# Altium PCB RpiAdapterPCB.PcbDoc
Units mm, origin at the board's own origin, x right, y up, seen from the top; angles counter-clockwise.
Board outline 75.5 x 57.27 mm, 2 copper layers (Top Layer, Bottom Layer); 84 components, 60 nets, 309 pads, 52 vias.
Unrouted connection lines stored in the file: 1.
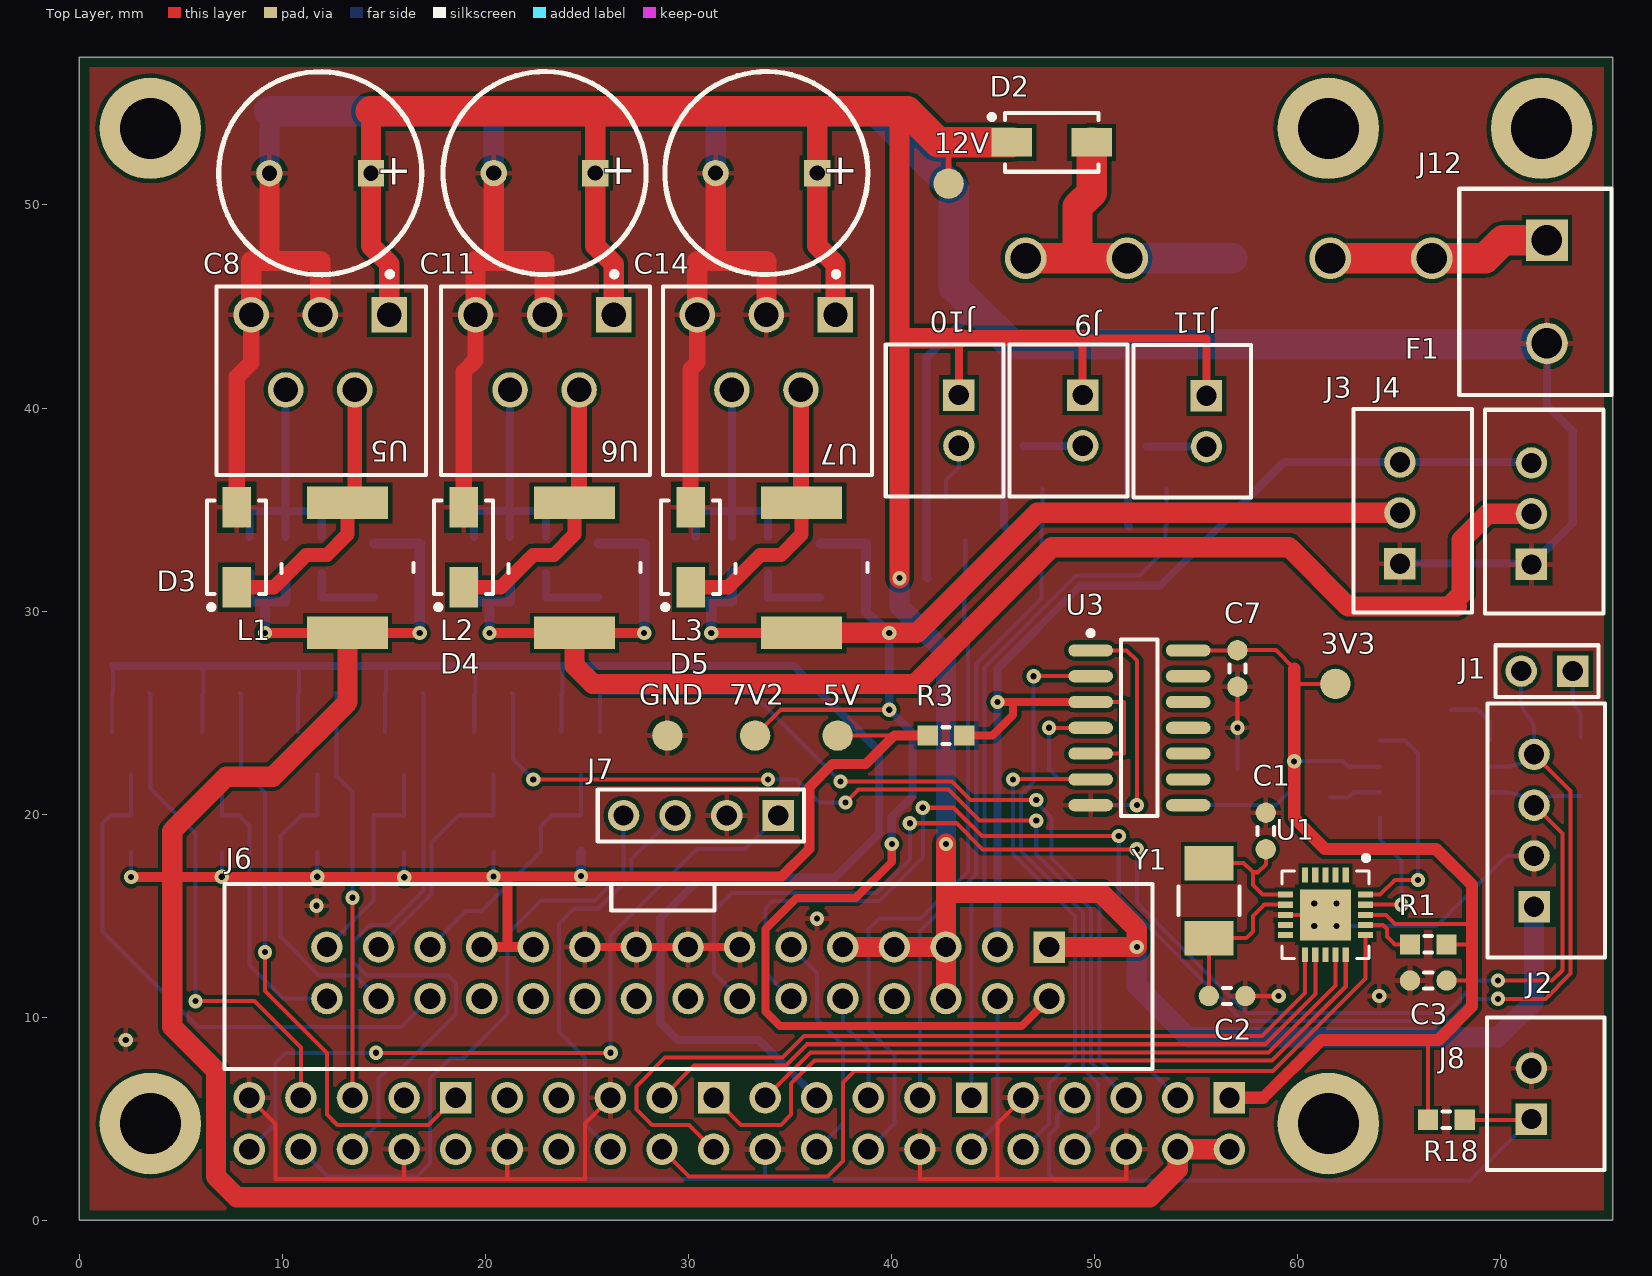
[diagram p0: Top Layer view]
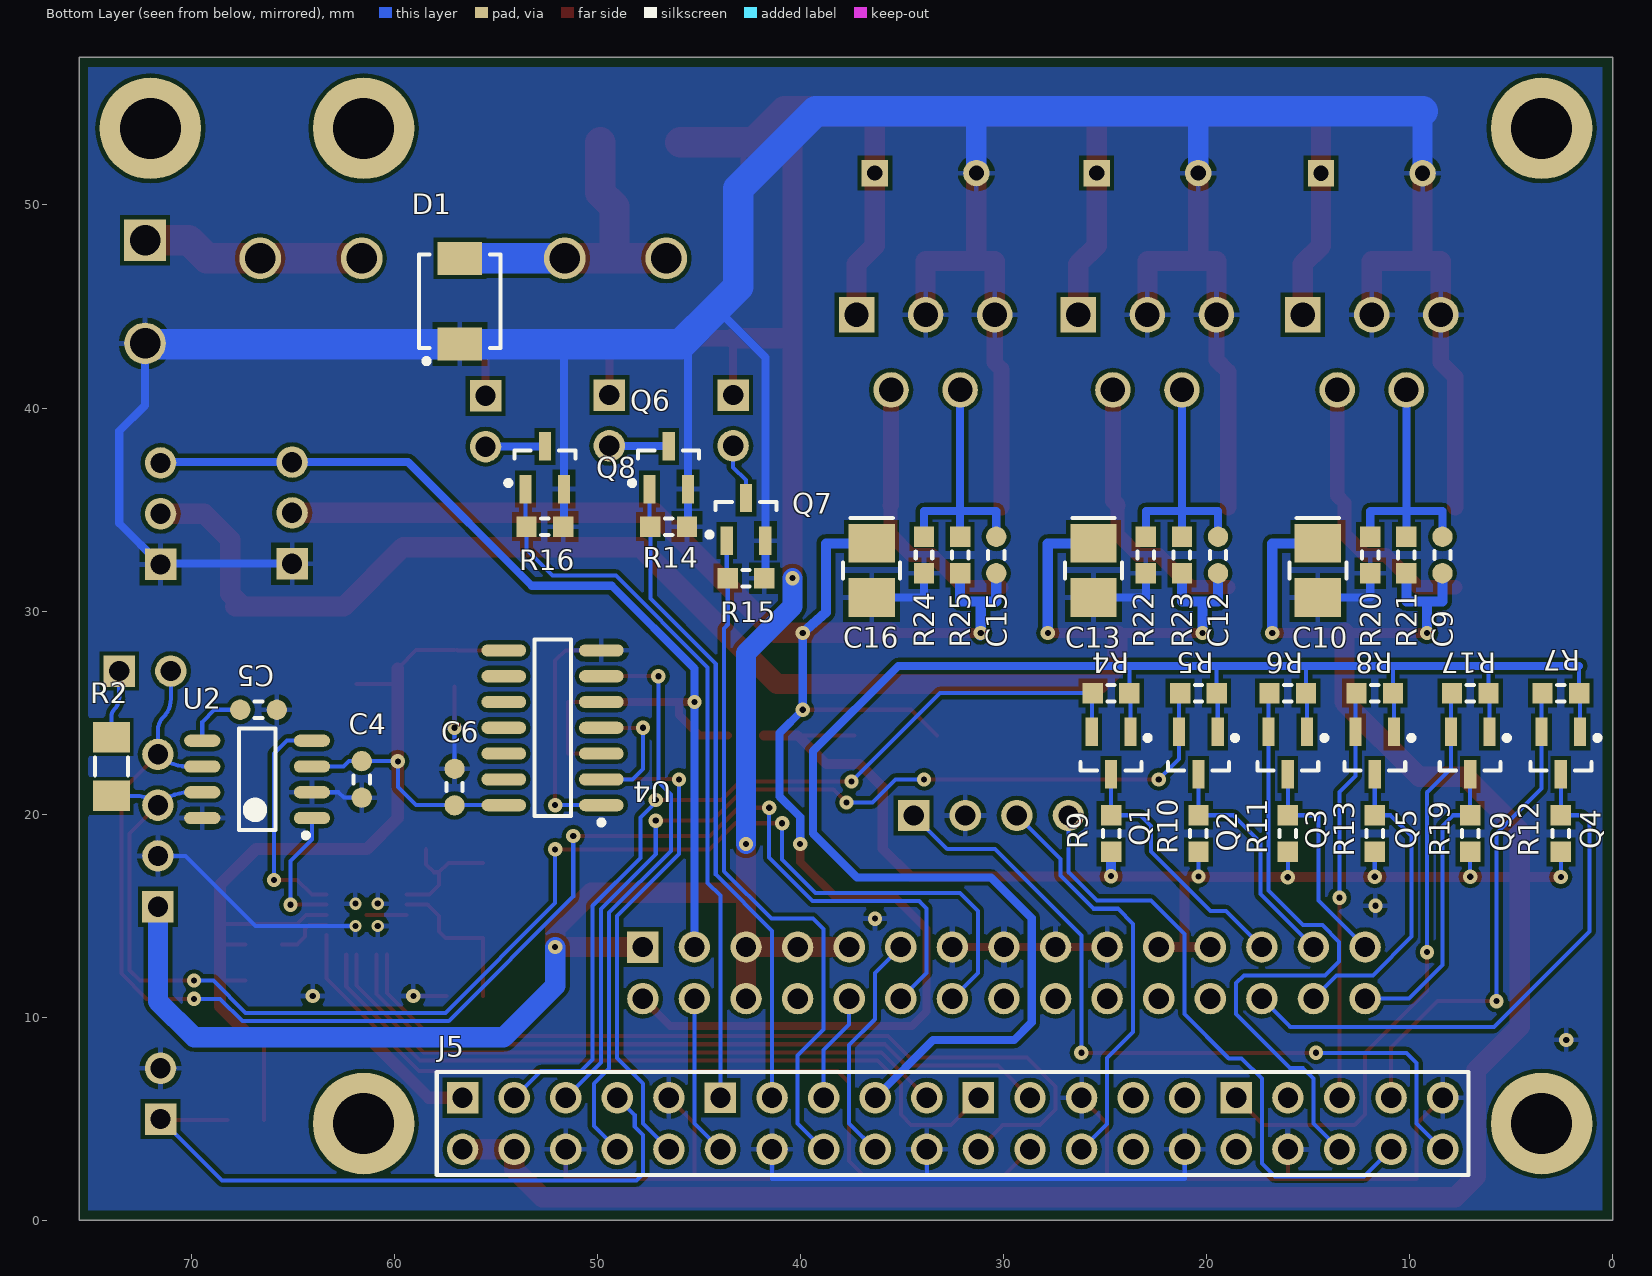
[diagram p1: Bottom Layer view, seen from below]

## Layer stack, top to bottom
Top Solder: solder mask 0.0102, Solder Resist, Dk 3.5
Top Layer: signal copper 0.0356
Dielectric 1: dielectric 0.32, FR-4, Dk 4.8
Bottom Layer: signal copper 0.0356
Bottom Solder: solder mask 0.0102, Solder Resist, Dk 3.5

## Board outline
0,0 0,57.27 75.5,57.27 75.5,0

## Design rules (kind name [scope] priority, off if disabled: settings)
Clearance ViaToViaClearance [IsVia vs IsVia] p1: gap=0.2
Clearance PolyClearance [InPolygon] p2: gap=0.2
Clearance PadToPadClearance [IsPad vs IsPad] p3: gap=0.2
Clearance TrackToAllClearance [IsTrack] p4: gap=0.2
HoleSize [All] p1: absolutevalues=TRUE maxlimit=10 minlimit=0.025 maxpercent=80.000 minpercent=20.000
HoleToHoleClearance [All] p1: gap=0.2 allowstackedmicrovias=TRUE
MinimumSolderMaskSliver [All] p1: minsoldermaskwidth=0.15
PolygonConnect [All] p1: connectstyle=Relief reliefconductorwidth=0.254 reliefentries=4 polygonreliefangle="90 Angle" airgapwidth=0.254
RoutingVias [All] p1: holewidth=0.3 width=0.6 viastyle="Through Hole" minholewidth=0.3 minwidth=0.6 maxholewidth=0.3 maxwidth=0.7
SilkToSilkClearance [All] p1: silktosilkclearance=0.2
SilkToSolderMaskClearance [IsPad] p1: minsilkscreentomaskgap=0.2 clearancetoexposedcopper=TRUE
SolderMaskExpansion [All] p1: expansion=0.1
Width [All] p1: maxlimit=10 minlimit=0.15 preferedwidth=0.5
25 further rules are at their usual default settings.

## Classes and differential pairs
component class Power: 3V3 5V 7V2 12V C8 C9 C10 C11 C12 C13 C14 C15 C16 D1 D2 D3 D4 D5 F1 GND J12 L1 L2 L3 R20 R21 R22 R23 R24 R25 U5 U6 U7
component class Interface: J5 J6 J7 J8 J9 J10 J11 Q1 Q2 Q3 Q4 Q5 Q6 Q7 Q8 Q9 R4 R5 R6 R7 R8 R9 R10 R11 R12 R13 R14 R15 R16 R17 R18 R19
component class Dynamixel: C6 C7 J3 J4 R3 U3 U4
component class CAN: C1 C2 C3 C4 C5 J1 J2 R1 R2 U1 U2 Y1

## Components (designator, comment, footprint, x,y, rotation, side; value= is the part's Value field where it differs from the comment)
3V3 "TestPoint" TestPoint 61.849,26.416 r90 top
5V "TestPoint" TestPoint 37.338,23.876 r0 top
7V2 "TestPoint" TestPoint 33.274,23.876 r90 top
12V "TestPoint" TestPoint 42.799,51.054 r90 top
C1 "22pF" CHIP_C_0603 58.42,19.177 r270 top
C2 "22pF" CHIP_C_0603 56.515,11.049 r180 top
C3 "0.1uF" CHIP_C_0603 66.421,11.811 r0 top
C4 "0.1uF" CHIP_C_0603 61.595,21.717 r90 bottom
C5 "0.1uF" CHIP_C_0603 66.675,25.146 r0 bottom
C6 "0.1uF" CHIP_C_0603 57.023,21.336 r270 bottom
C7 "0.1uF" CHIP_C_0603 57.023,27.178 r90 top
C8 "470uF x 50V" ALCAP_10x20 11.86,51.562 r180 top
C9 "3.3nF" CHIP_C_0603 8.382,32.766 r90 bottom
C10 "220uF x 10V" "Tantal - B" 14.516,32.004 r270 bottom
C11 "470uF x 50V" ALCAP_10x20 22.909,51.57 r180 top
C12 "1nF" CHIP_C_0603 19.431,32.766 r90 bottom
C13 "100uF x 16V" "Tantal - B" 25.565,32.004 r270 bottom
C14 "470uF x 50V" ALCAP_10x20 33.831,51.57 r180 top
C15 "3.3nF" CHIP_C_0603 30.353,32.766 r90 bottom
C16 "220uF x 10V" "Tantal - B" 36.487,32.004 r270 bottom
D1 "SM6T30CA" DO-214AA 56.765,45.261 r90 bottom
D2 "10MQ040" DO214-AC 47.879,53.086 r0 top
D3 "10MQ040(60)" DO214-AC 7.747,33.147 r90 top
D4 "10MQ040(60)" DO214-AC 18.923,33.147 r90 top
D5 "10MQ040(60)" DO214-AC 30.099,33.147 r90 top
F1 "FH-100" FH-100 66.595,47.371 r180 top
GND "TestPoint" TestPoint 28.956,23.876 r90 top
J1 "PLS-2" PLS-2 73.533,27.051 r180 top
J2 "CWF-4" CWF-4 71.628,15.447 r90 top
J3 "CWF-3(R)" CWF-3 65.024,32.338 r90 top
J4 "CWF-3(R)" CWF-3 71.501,32.298 r90 top
J5 "PBD40" PLD40 56.63,6.04 r180 bottom
J6 "BH-30" BH-30 47.752,13.462 r180 top
J7 "PLS-4" PLS-4 34.417,19.939 r180 top
J8 "CWF-2" CWF-2 71.501,4.993 r90 top
J9 "CWF-2" CWF-2 49.403,40.64 r270 top
J10 "CWF-2" CWF-2 43.307,40.64 r270 top
J11 "CWF-2" CWF-2 55.499,40.6 r270 top
J12 "MCV 1,5/ 2-G-3,81" CON_2_5.08 72.263,48.26 r270 top
L1 "CDRH74NP-680MC-B" CDRH74 13.208,32.131 r270 top
L2 "CDRH74NP-680MC-B" CDRH74 24.384,32.131 r270 top
L3 "CDRH74NP-680MC-B" CDRH74 35.56,32.131 r270 top
Q1 "IRLML2402" SOT23 24.697,22.86 r270 bottom
Q2 "IRLML2402" SOT23 20.397,22.86 r270 bottom
Q3 "IRLML2402" SOT23 15.997,22.86 r270 bottom
Q4 "IRLML2402" SOT23 2.553,22.86 r270 bottom
Q5 "IRLML2402" SOT23 11.715,22.86 r270 bottom
Q6 "IRLML6402" SOT23 46.482,37.211 r90 bottom
Q7 "IRLML6402" SOT23 42.672,34.671 r90 bottom
Q8 "IRLML6402" SOT23 52.578,37.211 r90 bottom
Q9 "IRLML2402" SOT23 7.015,22.86 r270 bottom
R1 "10K" CHIP_R_0603 66.421,13.589 r0 top
R2 "120R" CHIP_R_1206 73.914,22.352 r90 bottom
R3 "10K" CHIP_R_0603 42.672,23.876 r180 top
R4 "10K" CHIP_R_0603 24.697,25.961 r180 bottom
R5 "10K" CHIP_R_0603 20.397,25.961 r180 bottom
R6 "10K" CHIP_R_0603 15.997,25.961 r180 bottom
R7 "10K" CHIP_R_0603 2.553,25.961 r180 bottom
R8 "10K" CHIP_R_0603 11.715,25.961 r180 bottom
R9 "10K" CHIP_R_0603 24.697,19.05 r270 bottom
R10 "10K" CHIP_R_0603 20.397,19.05 r270 bottom
R11 "10K" CHIP_R_0603 15.997,19.05 r270 bottom
R12 "10K" CHIP_R_0603 2.553,19.05 r270 bottom
R13 "10K" CHIP_R_0603 11.715,19.05 r270 bottom
R14 "10K" CHIP_R_0603 46.482,34.163 r180 bottom
R15 "10K" CHIP_R_0603 42.672,31.623 r180 bottom
R16 "10K" CHIP_R_0603 52.578,34.163 r180 bottom
R17 "10K" CHIP_R_0603 7.015,25.961 r180 bottom
R18 "10K" CHIP_R_0603 67.31,4.953 r180 top
R19 "10K" CHIP_R_0603 7.015,19.05 r270 bottom
R20 "1K" CHIP_R_0603 11.938,32.766 r90 bottom
R21 "3K" CHIP_R_0603 10.16,32.766 r270 bottom
R22 "1K5" CHIP_R_0603 22.987,32.766 r90 bottom
R23 "12K" CHIP_R_0603 21.209,32.766 r270 bottom
R24 "6K8" CHIP_R_0603 33.909,32.766 r90 bottom
R25 "33K" CHIP_R_0603 32.131,32.766 r270 bottom
U1 "MCP2515" QFN20 61.357,15.046 r270 top
U2 "SN65HVD230D" SOIC8 66.746,21.717 r0 bottom
U3 "74HC126" SOIC14 52.197,24.257 r0 top
U4 "74HC04" SOIC14 52.197,24.257 r0 bottom
U5 "LM2596-ADJ" TO-220-5 15.26,44.594 r180 top
U6 "LM2596-ADJ" TO-220-5 26.309,44.594 r180 top
U7 "LM2596-ADJ" TO-220-5 37.231,44.594 r180 top
Y1 "KX-K 16 MHZ" CHIP_CRYSTAL_5032 55.626,15.748 r270 top

## Footprints (in the part's own frame and the unit in brackets; to place one, negate y for a bottom-side part, rotate by r counter-clockwise, add the part's x,y. Pads: shape width x height; smd on the part's side, far side on the other; paste and mask are expansions set on the pad)
ALCAP_10x20 [mm]
  rect 1.3x1.3 hole 0.75: 1(-2.5,0)
  round 1.3 hole 0.75: 2(2.5,0)
  silkscreen extent -5,-5 5,5, body extent -5.1,-5.07 5.06,5.09, height 20.32
BH-30 [mm]
  rect 1.55x1.55 hole 1: 1(0,0)
  round 1.55 hole 1: 2(0,2.54) 3(2.54,0) 4(2.54,2.54) 5(5.08,0) 6(5.08,2.54) 7(7.62,0) 8(7.62,2.54) 9(10.16,0) 10(10.16,2.54) 11(12.7,0) 12(12.7,2.54) 13(15.24,0) 14(15.24,2.54) 15(17.78,0) 16(17.78,2.54) 17(20.32,0) 18(20.32,2.54) 19(22.86,0) 20(22.86,2.54) 21(25.4,0) 22(25.4,2.54) 23(27.94,0) 24(27.94,2.54) 25(30.48,0) 26(30.48,2.54) 27(33.02,0) 28(33.02,2.54) 29(35.56,0) 30(35.56,2.54)
  silkscreen extent -5.1,-3.1 40.6,6, body extent -5.1,-3 40.6,6, height 8.9
CDRH74 [mm]
  rect 1.6x4 smd: 1(-3.2,0) 2(3.2,0)
  silkscreen extent -0.25,-3.25 0.25,3.25, body extent -3.65,-3.65 3.65,3.65, height 4.5
CHIP_C_0603 [mm] "CHIP_C_0603"
  round 1 smd: 1(-0.9,0) 2(0.9,0)
  silkscreen extent -0.2,-0.4 0.2,0.4, body extent -0.8,-0.4 0.8,0.4, height 0.3
CHIP_CRYSTAL_5032 [mm]
  rect 1.7x2.4 smd: 1(-1.85,0) 2(1.85,0)
  silkscreen extent -0.7,-1.5 0.7,1.5, body extent -2.5,-1.6 2.5,1.6, height 1.3
CHIP_R_0603 [mm] "CHIP_R_0603"
  rect 1x1 smd: 1(-0.9,0) 2(0.9,0)
  silkscreen extent -0.18,-0.41 0.18,0.41, body extent -1.26,-0.49 1.34,0.51, height 0.48
CHIP_R_1206 [mm] "CHIP_R_1206"
  rect 1.5x1.8 smd: 1(-1.45,0) 2(1.45,0)
  silkscreen extent -0.43,-0.81 0.43,0.81, body extent -2.04,-0.89 2.16,0.91, height 0.58
CON_2_5.08 [mm]
  rect 2.05x2.05 hole 1.5: 1(0,0)
  round 2.05 hole 1.5: 2(5.08,0)
  silkscreen extent -2.54,-4.32 7.62,3.18, body extent -2.54,-4.33 7.62,3.17, height 10
CWF-2 [mm]
  rect 1.55x1.55 hole 1: 1(0,0)
  round 1.55 hole 1: 2(2.5,0)
  silkscreen extent -2.5,-3.6 5,2.2, body extent -2.5,-3.55 5,2.2, height 7
CWF-3 [mm]
  rect 1.55x1.55 hole 1: 1(0,0)
  round 1.55 hole 1: 2(2.5,0) 3(5,0)
  silkscreen extent -2.41,-3.56 7.62,2.29, body extent -2.41,-3.51 7.59,2.24, height 7
CWF-4 [mm]
  rect 1.55x1.55 hole 1: 1(0,0)
  round 1.55 hole 1: 2(2.5,0) 3(5,0) 4(7.5,0)
  silkscreen extent -2.5,-3.5 10,2.3, body extent -2.4,-3.57 10,2.17, height 7
DO214-AC [mm] "Molded Diode, 2-Leads, Body 4,3x2,7mm, IPC High Density"
  rect 2x1.4 smd: 1(1.965,0) 2(-1.965,0)
  silkscreen extent -3.07,-1.45 2.3,1.45, body extent -2.5,-1.35 2.5,1.35, height 2.15
DO-214AA [mm] "SMB"
  rect 1.62x2.18 smd: 1(2.11,0) 2(-2.11,0)
  silkscreen extent -3.07,-2 2.3,2, body extent -2.7,-1.8 2.7,1.8, height 2.3
FH-100 [mm]
  round 2.05 hole 1.5: 1(0,0) 1(5,0) 2(15,0) 2(20,0)
  body extent -0.4,-3.5 20.4,3.5, height 9.99
PLD40 [mm]
  rect 1.55x1.55 hole 1: 1(0,0) 21(25.4,0) 31(38.1,0)
  round 1.55 hole 1: 2(0,-2.54) 3(2.54,0) 4(2.54,-2.54) 5(5.08,0) 6(5.08,-2.54) 7(7.62,0) 8(7.62,-2.54) 9(10.16,0) 10(10.16,-2.54) 12(12.7,-2.54) 13(15.24,0) 14(15.24,-2.54) 15(17.78,0) 16(17.78,-2.54) 17(20.32,0) 18(20.32,-2.54) 19(22.86,0) 20(22.86,-2.54) 22(25.4,-2.54) 23(27.94,0) 24(27.94,-2.54) 25(30.48,0) 26(30.48,-2.54) 27(33.02,0) 28(33.02,-2.54) 29(35.56,0) 30(35.56,-2.54) 32(38.1,-2.54) 33(40.64,0) 34(40.64,-2.54) 35(43.18,0) 36(43.18,-2.54) 37(45.72,0) 38(45.72,-2.54) 39(48.26,0) 40(48.26,-2.54)
  rect 1.55x1.524 hole 1: 11(12.7,0)
  silkscreen extent -1.27,-3.81 49.53,1.27, body extent -1.3,-3.84 49.5,1.24, height 8.4
PLS-2 [mm]
  rect 1.55x1.55 hole 1: 1(0,0)
  round 1.55 hole 1: 2(2.54,0)
  silkscreen extent -1.27,-1.27 3.81,1.27, body extent -1.27,-1.27 3.81,1.27, height 8.44
PLS-4 [mm]
  rect 1.55x1.55 hole 1: 1(0,0)
  round 1.55 hole 1: 2(2.54,0) 3(5.08,0) 4(7.62,0)
  silkscreen extent -1.27,-1.27 8.89,1.27, body extent -1.27,-1.27 8.89,1.27, height 8.44
QFN20 [mm]
  rect 0.73x0.3 smd: 1(-1.965,1) 2(-1.965,0.5) 3(-1.965,0) 4(-1.965,-0.5) 5(-1.965,-1) 11(1.965,-1) 12(1.965,-0.5) 13(1.965,0) 14(1.965,0.5) 15(1.965,1)
  rect 0.3x0.73 smd: 6(-1,-1.965) 7(-0.5,-1.965) 8(0,-1.965) 9(0.5,-1.965) 10(1,-1.965) 16(1,1.965) 17(0.5,1.965) 18(0,1.965) 19(-0.5,1.965) 20(-1,1.965)
  rect 2.5x2.5 smd: 21(0,0)
  silkscreen extent -2.92,-2.15 2.15,2.15, body extent -2,-2 2.01,2.01, height 0.9
SOIC8 [mm] "SOIC, 8-Leads, Body 5,0x4,0mm (max), Pitch 1,27mm, IPC Medium Density"
  oval 1.78x0.6 smd: 1(-2.7,1.905) 2(-2.7,0.635) 3(-2.7,-0.635) 4(-2.7,-1.905) 5(2.7,-1.905) 6(2.7,-0.635) 7(2.7,0.635) 8(2.7,1.905)
  silkscreen extent -2.52,-2.5 0.9,2.88, body extent -3,-2.45 3,2.45, height 1.75
SOIC14 [mm]
  oval 2.2x0.6 smd: 1(-2.4,3.81) 2(-2.4,2.54) 3(-2.4,1.27) 4(-2.4,0) 5(-2.4,-1.27) 6(-2.4,-2.54) 7(-2.4,-3.81) 8(2.4,-3.81) 9(2.4,-2.54) 10(2.4,-1.27) 11(2.4,0) 12(2.4,1.27) 13(2.4,2.54) 14(2.4,3.81)
  silkscreen extent -2.52,-4.35 0.9,4.78, body extent -3,-4.4 3,4.4, height 1.7
SOT23 [mm] "SOT23, 3-Leads, Body 3,0x2,6mm (max), Pitch 0,95mm, IPC Medium Density"
  rect 1.4x0.6 smd: 1(-1.2,0.95) 2(-1.2,-0.95) 3(0.9,0)
  silkscreen extent -1.02,-1.5 0.7,1.92, body extent -1.53,-1.46 1.02,1.46, height 0.99
"Tantal - B" [mm]
  rect 1.9x2.28 smd: 1(-1.33,0) 2(1.33,0)
  silkscreen extent -2.58,-1.4 0.4,1.4, body extent -1.75,-1.4 1.75,1.4, height 1.9
TestPoint [mm]
  round 1.5 smd: 1(0,0)
TO-220-5 [mm]
  rect 1.75x1.75 hole 1.2: 1(0,0)
  round 1.75 hole 1.2: 2(1.7,3.7) 3(3.4,0) 4(5.1,3.7) 5(6.8,0)
  silkscreen extent -1.8,-2.13 8.5,7.9, body extent -1.68,-0.28 8.48,7.96, height 21.35

## Part data
C1 C2 C3 C4 C5 C6 C7 C9 C12 C15: library part CHIP_C
C8 C11 C14: library part Electrolit
C10 C13 C16: library part Tantal
D1: library part SM6T27CA, "ESD protection"
D2: "Rectifier diode"
D3 D4 D5: library part 10MQ040, "Rectifier diode"
F1: library part "FuseGlass 5x20"
J1 J8 J9 J10 J11: "Connector"
J3 J4: "Conector"
J5: library part RPiGPIO
L1 L2 L3: library part CDRH74
Q1 Q2 Q3 Q4 Q5 Q9: "n-chanal MOSFET"
Q6 Q7 Q8: "p-chanal MOSFET"
R1 R3 R4 R5 R6 R7 R8 R9 R10 R11 R12 R13 R14 R15 R16 R17 R18 R19 R20 R21 R22 R23 R24 R25: library part RES_0603
R2: library part RES_1206
U1: library part MCP2515_QFN
U2: library part TJA1050
U5 U6 U7: library part "LM2596 (5 pin)"
Y1: library part Quartz

## Free pads (board coordinates)
  round 5 hole 3: 1(3.5,4.77) 1(3.5,53.77) 1(61.5,4.77) 1(61.5,53.77) 1(72,53.77)

## Via types
v1: diameter 0.7, hole 0.3, Top Layer to Bottom Layer, tented both sides, 48 vias
v2: diameter 0.6, hole 0.3, Top Layer to Bottom Layer, tented both sides, 4 vias

## Nets (pads, with @x,y where several pads share a name; then routed paths per layer and width w, separated by ;. In a path a pad name is that pad's centre, name@x,y a point inside that pad or via, vN(x,y) a via of type N, cw(c..) or ccw(c..) an arc to the next point about the centre after c; other vN are vias at no path point)
1A: J6.25 Q1.3 R9.1 | length 12.9
  Bottom Layer w0.2: J6.25 19.05,15.24 19.812,15.24 22.733,18.161 22.733,19.431 23.252,19.95 R9.1 Q1.3
1B: J6.27 Q2.3 R10.1 | length 11.9
  Bottom Layer w0.2: J6.27 17.347,16.077 17.347,18.617 18.68,19.95 R10.1 Q2.3
1C: J6.29 Q3.3 R11.1 | length 11
  Bottom Layer w0.2: J6.29 14.489,15.759 14.489,19.95 R11.1 Q3.3
2A: J6.26 Q4.3 R12.1 | length 27.6
  Bottom Layer w0.2: Q4.3 R12.1 1.535,19.95 1.143,19.558 1.143,14.224 5.842,9.525 15.875,9.525 J6.26
2B: J6.28 Q5.3 R13.1 | length 15.3
  Bottom Layer w0.2: Q5.3 R13.1 10.933,19.95 9.906,18.923 9.906,13.97 11.811,12.065 13.589,12.065 J6.28
2C: J6.30 Q9.3 R19.1 | length 14.9
  Bottom Layer w0.2: Q9.3 R19.1 7.863,19.95 8.382,19.431 8.382,12.573 10.033,10.922 J6.30
3V3: 3V3.1 C3.2 C4.2 C6.2 C7.2 J5.1 J5.17 Q1.1 Q2.1 Q3.1 Q4.1 Q5.1 Q9.1 R1.2 R4.2 R5.2 R6.2 R7.2 R8.2 R17.2 R18.2 U1.18 U2.3 U3.14 U4.14 | length 158
  Top Layer w0.2: U3.14 56.885,28.067 C7.2@56.896,28.078 ; C7.2 58.917,28.078 59.817,27.178 ; 59.817,26.416 3V3.1 ; U1.18 64.329,15.046 64.77,14.605 68.58,14.605 ; R18.2 66.41,8.879 66.421,8.89 ; C3.2 68.58,11.811 ; R1.2 68.58,13.589
  Top Layer w0.6: J5.1 58.3,6.04 61.15,8.89 66.421,8.89 66.929,8.89 68.58,10.541 68.58,11.811 68.58,13.589 68.58,14.605 68.58,16.51 66.802,18.288 61.341,18.288 59.817,19.812 v1(59.817,22.606) 59.817,26.416 59.817,27.178
  Bottom Layer w0.2: Q4.1 1.603,25.911 R7.2 1.653,27.303 1.651,27.305 ; Q9.1 6.065,25.911 R17.2 6.115,27.197 6.223,27.305 ; Q5.1 10.765,25.911 R8.2 10.815,27.285 10.795,27.305 ; Q3.1 15.047,25.911 R6.2 15.097,27.289 15.113,27.305 ; 19.431,27.305 19.497,27.239 R5.2 19.447,25.911 Q2.1 ; Q1.1 23.747,25.911 R4.2 23.797,27.257 23.749,27.305 ; U4.14 58.928,20.447 59.817,21.336 v1(59.817,22.606) 59.828,22.617 C4.2 62.219,22.617 62.484,22.352 U2.3
  Bottom Layer w0.4: 1.651,27.305 6.223,27.305 10.795,27.305 15.113,27.305 19.431,27.305 23.749,27.305 35.179,27.305 39.37,23.114 39.37,19.05 37.211,16.891 30.607,16.891 28.607,14.891 28.607,9.747 29.464,8.89 33.46,8.89 J5.17
5V: 5V.1 C9.1 C10.1 J5.2 J5.4 J6.21 J6.23 L1.2 R3.2 R9.2 R10.2 R11.2 R12.2 R13.2 R19.2 R21.2 | length 165
  Top Layer w0.2: v1@20.36,16.904 v1(20.397,16.941) ; 5V.1 40.132,23.876
  Top Layer w0.5: v1(2.553,16.904) 4.572,16.904 v1@20.36,16.904 ; v1(9.144,28.931) L1.2 v1(16.764,28.931) ; J6.23 21.082,13.462 ; v1(20.397,16.941) 21.082,16.941 ; J6.21 21.082,13.462 ; v1@24.638,16.891 v1@24.688,16.941 ; v1(24.697,16.95) v1@24.688,16.941 ; R3.2 40.132,23.876 38.735,22.479 37.084,22.479 35.941,21.336 35.941,18.288 34.594,16.941 v1@24.688,16.941 ; 21.082,13.462 21.082,16.941 ; 21.082,16.941 v1@24.688,16.941
  Top Layer w1: L1.2 13.208,25.527 9.525,21.844 7.239,21.844 4.572,19.177 4.572,16.904 4.572,9.525 6.731,7.366 6.731,2.159 7.747,1.143 52.705,1.143 54.09,2.528 J5.4 J5.2
  Bottom Layer w0.2: v1(2.553,16.904) R12.2 ; v1(7.015,16.921) R19.2 ; v1(11.715,16.922) R13.2 ; v1(15.997,16.896) R11.2 ; v1(20.397,16.941) R10.2
  Bottom Layer w0.5: C9.1 8.382,30.48 9.144,30.48 ; v1(9.144,28.931) 9.144,30.48 ; R21.2 10.16,30.48 9.144,30.48 ; C10.1 16.764,33.334 v1(16.764,28.931) ; v1(24.697,16.95) R9.2
7V2: 7V2.1 C15.1 C16.1 J3.2 J6.2 L3.2 R25.2 | length 95.2
  Top Layer w0.2: 7V2.1 34.544,25.146 v1(39.878,25.146)
  Top Layer w0.4: v1(40.005,18.542) 40.005,17.653 38.227,15.875 35.306,15.875 33.782,14.351 33.782,10.287 34.495,9.574 46.404,9.574 J6.2
  Top Layer w0.5: v1(31.115,28.931) L3.2@35.306,28.931
  Top Layer w1: L3.2 v1(39.878,28.931) 41.25,28.931 47.157,34.838 J3.2
  Bottom Layer w0.4: v1(39.878,28.931) v1(39.878,25.146) 41.021,24.003 41.021,20.873 40.005,19.857 v1(40.005,18.542)
  Bottom Layer w0.5: C15.1 30.353,30.48 31.115,30.48 ; v1@31.115,28.829 v1@31.14,28.804 ; v1(31.115,28.931) 31.115,30.48 ; R25.2 32.131,30.48 31.115,30.48 ; C16.1 38.735,33.334 38.735,29.947 v1(39.878,28.931)
11V1: C12.1 C13.1 J4.2 L2.2 R23.2 | length 77.2
  Top Layer w0.5: v1(20.193,28.931) L2.2 v1(27.813,28.931)
  Top Layer w1: L2.2@24.384,28.804 24.384,27.305 25.273,26.416 41.148,26.416 47.879,33.147 59.563,33.147 62.484,30.226 67.437,30.226 ; 67.818,30.226 67.437,30.226 ; J4.2 69.342,34.798 68.072,33.528 68.072,30.861 67.437,30.226
  Bottom Layer w0.5: C12.1 19.431,30.48 20.193,30.48 ; v1(20.193,28.931) 20.193,30.48 ; R23.2 21.209,30.48 20.193,30.48 ; C13.1 27.813,33.334 v1(27.813,28.931)
12V: 12V.1 C8.1 C11.1 C14.1 D2.2 J2.1 J6.1 J6.5 J6.6 J6.7 J6.9 J9.1 J10.1 J11.1 U5.1 U6.1 U7.1 | length 182.1
  Top Layer w0.3: 42.291,53.086 42.799,52.578 12V.1
  Top Layer w0.4: J10.1 43.307,43.434 ; J9.1 49.403,43.434 55.499,43.434 J11.1
  Top Layer w0.8: 43.307,43.434 49.403,43.434
  Top Layer w1: 14.351,54.61 14.36,54.601 C8.1 14.36,47.997 15.26,47.097 U5.1 ; 25.4,54.61 25.409,54.601 C11.1 25.409,47.997 26.309,47.097 U6.1 ; 36.322,54.61 36.331,54.601 C14.1 36.331,47.997 37.231,47.097 U7.1 ; J6.9 J6.7 J6.5 ; v1(40.386,31.623) 40.386,43.434 ; 40.386,54.61 40.386,43.434 ; J6.6 J6.5 ; v1(42.672,18.542) 42.672,16.129 ; 43.307,43.434 40.386,43.434 ; J6.1 v1(52.07,13.462) 52.07,14.351 50.292,16.129 42.672,16.129 ; J6.5 42.672,16.129
  Top Layer w1.5: 14.351,54.61 25.4,54.61 36.322,54.61 40.386,54.61 40.767,54.61 42.291,53.086 D2.2
  Bottom Layer w1: v1(40.386,31.623) 40.386,30.226 42.672,27.94 v1(42.672,18.542) ; v1(52.07,13.462) 52.07,11.557 54.61,9.017 69.85,9.017 71.628,10.795 J2.1
BUTTON: J5.7 J8.1 R18.1 | length 32.7
  Top Layer w0.2: R18.1 71.461,4.953 J8.1
  Bottom Layer w0.2: J5.7 48.152,5.182 48.152,4.616 47.752,4.216 47.752,2.286 48.068,1.97 68.478,1.97 J8.1
CAN_I\N\T\: J5.22 U1.11 | length 42.5
  Top Layer w0.2: J5.22 30.031,4.699 28.194,4.699 27.432,5.461 27.432,6.604 28.848,8.02 34.619,8.02 35.673,9.074 58.223,9.074 60.357,11.208 U1.11
CAN_RX: U1.20 U2.4 | length 11.2
  Top Layer w0.2: U1.20 64.052,16.046 64.77,16.764 v1(65.913,16.764)
  Bottom Layer w0.2: U2.4 65.278,23.622 65.913,22.987 v1(65.913,16.764)
CAN_TX: U1.19 U2.1 | length 6.5
  Top Layer w0.2: U1.19 v1(65.099,15.546)
  Bottom Layer w0.2: U2.1 64.046,18.758 65.099,17.705 v1(65.099,15.546)
CANH: J2.3 J6.14 R2.1 U2.7 | length 69.2
  Top Layer w0.2: v1(40.894,19.558) 43.18,19.558 44.465,18.273 v1(52.07,18.273) ; v1(69.85,11.811) 72.517,11.811 73.025,12.319 73.025,19.05 J2.3
  Bottom Layer w0.2: J6.14 31.242,12.192 31.242,15.24 32.131,16.129 39.243,16.129 40.894,17.78 v1(40.894,19.558) ; v1(52.07,18.273) 52.07,15.621 57.474,10.217 67.309,10.217 68.903,11.811 v1(69.85,11.811) ; U2.7 70.095,21.082 cw(c70.095,18.914) J2.3 cw(c72.726,19.349) 72.726,20.902 R2.1
CANL: J1.2 J2.4 J6.12 U2.6 | length 73.3
  Top Layer w0.2: v1(41.529,20.32) 43.053,20.32 44.45,18.923 v1(51.181,18.923) ; v1(69.85,10.911) 72.183,10.911 73.425,12.153 73.425,21.15 J2.4
  Bottom Layer w0.2: J6.12 33.782,12.192 33.782,15.367 34.144,15.729 39.409,15.729 41.544,17.864 41.544,20.305 v1(41.529,20.32) ; v1(51.181,18.923) 51.181,15.944 57.308,9.817 67.475,9.817 68.569,10.911 v1(69.85,10.911) ; U2.6 70.192,22.352 ccw(c70.192,24.383) J2.4 71.628,24.152 ccw(c70.761,24.152) 71.374,24.765 cw(c72.294,25.685) 70.993,25.685 J1.2
CE: J5.24 U1.16 | length 43.6
  Top Layer w0.2: J5.24 30.031,2.159 36.83,2.159 37.592,2.921 37.592,6.782 38.176,7.366 58.778,7.366 63.322,11.91 U1.16
CLK: J5.23 U1.12 | length 36.2
  Top Layer w0.2: J5.23 30.27,7.62 34.784,7.62 35.838,8.674 58.389,8.674 60.857,11.142 U1.12
D\I\R\: U3.4 U4.2 | length 6.3
  Top Layer w0.2: v1(47.752,24.257) U3.4
  Bottom Layer w0.2: v1(47.752,24.257) 47.752,22.225 48.26,21.717 U4.2
DIR: U3.1 U4.1 | length 11.9
  Top Layer w0.2: U3.1 51.562,28.067 52.07,27.559 v1(52.07,20.447)
  Bottom Layer w0.2: U4.1 v1(52.07,20.447)
DLX-DATA: J3.3 J4.3 J6.3 R3.1 U3.3 U3.5 | length 58.1
  Top Layer w0.2: U3.5 51.435,22.987 51.435,25.527 U3.3
  Top Layer w0.4: R3.1 44.958,23.876 45.974,24.892 45.974,25.527 ; v1(45.212,25.527) 45.974,25.527 ; U3.3 45.974,25.527
  Bottom Layer w0.2: v1@45.201,25.538 v1(45.212,25.527) ; J4.3@71.461,37.338 J4.3
  Bottom Layer w0.4: J6.3 v1(45.212,25.527) 45.212,27.178 49.284,31.25 53.221,31.25 59.309,37.338 J3.3 J4.3@71.461,37.338
FAN1: J5.13 Q6.1 R14.1 | length 32.5
  Bottom Layer w0.2: J5.13 41.39,14.255 44.162,17.027 44.162,27.401 47.382,30.621 R14.1 47.432,34.213 Q6.1
FAN2: J5.16 Q7.1 R15.1 | length 34.4
  Bottom Layer w0.2: J5.16 40.132,4.782 40.132,8.128 38.862,9.398 38.862,14.351 39.37,14.859 41.428,14.859 43.762,17.193 43.762,29.147 43.572,29.337 R15.1 43.622,31.673 Q7.1
FAN3: J5.11 Q8.1 R16.1 | length 35.8
  Bottom Layer w0.2: J5.11 43.93,15.99 44.562,16.622 44.562,27.235 49.077,31.75 52.197,31.75 53.478,33.031 R16.1 53.528,34.213 Q8.1
GND: C1.1 C2.1 C3.1 C4.1 C5.1 C6.1 C7.1 C8.2 C10.2 C11.2 C13.2 C14.2 C16.2 D1.2 D3.1 D4.1 D5.1 GND.1 J2.2 J3.1 J4.1 J5.6 J5.9 J5.14 J5.20 J5.25 J5.30 J5.34 J5.39 J6.13 J6.15 J6.17 J6.19 J7.2 J8.2 J12.2 Q6.2 Q7.2 Q8.2 R14.2 R15.2 R16.2 R20.1 R22.1 R24.1 U1.8 U1.21 U2.2 U2.8 U3.7 U4.7 U5.3 U5.5 U6.3 U6.5 U7.3 U7.5 | length 308.9
  Top Layer w0.2: J5.39 9.652,4.758 9.652,2.032 15.99,2.032 ; J5.34 15.99,2.032 ; J5.30 21.07,2.032 ; J5.25 24.892,4.782 24.892,2.032 21.07,2.032 ; J5.14 41.39,2.032 45.212,2.032 ; J5.9 45.212,4.782 45.212,2.032 ; J5.6 51.55,2.032 45.212,2.032 ; v1(57.023,24.257) C7.1 ; C2.1 v1(59.055,11.049) ; U1.8 U1.21 ; 15.99,2.032 21.07,2.032
  Top Layer w0.4: J6.19 J6.17 J6.15 J6.13
  Top Layer w0.8: D3.1 7.747,41.529 8.46,42.242 U5.5 ; D4.1 18.923,41.783 19.509,42.369 U6.5 ; D5.1 30.099,41.91 30.431,42.242 U7.5
  Top Layer w1: U5.5 8.46,47.244 9.36,47.244 ; C8.2 9.36,47.244 ; U5.3 11.86,47.244 9.36,47.244 ; U6.5 19.509,47.244 20.409,47.244 ; C11.2 20.409,47.244 ; U6.3 22.909,47.244 20.409,47.244 ; U7.5 30.431,47.244 31.331,47.244 ; C14.2 31.331,47.244 ; U7.3 33.831,47.244 31.331,47.244
  Bottom Layer w0.2: J5.30 21.07,2.032 33.77,2.032 ; J5.20 33.77,2.032 ; J5.14 41.39,2.032 33.77,2.032 ; C6.1 v1(57.023,24.257) ; C4.1 62.473,20.817 62.738,21.082 U2.2 ; v2(61.907,14.496) 66.82,14.496 70.271,17.947 J2.2
  Bottom Layer w0.4: R20.1 11.938,30.674 C10.2 ; R22.1 22.987,30.674 C13.2 ; R24.1 33.909,30.674 C16.2 ; R15.2 41.722,31.673 Q7.2 41.722,42.484 44.133,44.895 ; R14.2 45.532,34.213 Q6.2 45.532,42.807 45.876,43.151 ; R16.2 51.628,34.213 Q8.2 51.628,43.09 51.689,43.151 ; J3.1 71.461,32.338 J4.1 73.533,34.33 73.533,38.862 72.263,40.132 J12.2
  Bottom Layer w1: C8.2 9.36,54.61 ; C11.2 20.409,54.61 ; C14.2 31.331,54.61
  Bottom Layer w1.5: 9.36,54.61 20.409,54.61 31.331,54.61 39.243,54.61 43.053,50.8 43.053,45.974 44.133,44.895 45.876,43.151 51.689,43.151 D1.2 72.234,43.151 J12.2
  other v1: 2.286,8.89 64.008,11.049 36.322,14.859 11.684,15.494
  other v2: 60.807,14.496 60.807,15.596 61.907,15.596
IO2: J5.3 Q1.2 R4.1 | length 44.3
  Top Layer w0.2: v1(37.484,21.609) 42.965,21.609 43.873,20.701 v1(47.117,20.701)
  Bottom Layer w0.2: Q1.2 25.647,25.911 R4.1 33.132,25.961 v1(37.484,21.609) ; v1(47.117,20.701) 47.117,20.604 47.879,19.842 47.879,17.838 50.222,15.495 50.222,7.934 50.79,7.366 52.764,7.366 J5.3
IO3: J5.5 Q2.2 R5.1 | length 46.3
  Top Layer w0.2: v1(22.352,21.717) v1(33.909,21.717) ; v1(37.719,20.574) 38.354,21.209 42.799,21.209 44.323,19.685 v1(47.117,19.685)
  Bottom Layer w0.2: R5.1 21.347,25.911 Q2.2 21.347,22.722 v1(22.352,21.717) ; v1(33.909,21.717) 35.306,21.717 36.449,20.574 v1(37.719,20.574) ; v1(47.117,19.685) 47.117,18.034 49.822,15.329 49.822,7.768 J5.5
IO6: J5.31 Q9.2 R17.1 | length 29.6
  Top Layer w0.2: v1(9.144,13.208) 9.144,11.303 12.192,8.255 12.192,5.207 12.7,4.699 17.189,4.699 J5.31
  Bottom Layer w0.2: R17.1 7.965,25.911 Q9.2 7.965,22.261 9.144,21.082 v1(9.144,13.208)
IO16: J5.36 Q3.2 R6.1 | length 31.4
  Bottom Layer w0.2: J5.36 14.732,4.782 14.732,6.985 15.24,7.493 15.875,7.493 18.542,10.16 18.542,11.684 18.161,12.065 14.155,12.065 13.466,12.754 13.466,13.716 14.287,14.537 15.241,14.537 16.947,16.243 Q3.2 16.947,25.911 R6.1
IO19: J5.35 Q5.2 R8.1 | length 20.3
  Top Layer w0.2: J5.35 v1(13.45,15.887)
  Bottom Layer w0.2: R8.1 12.665,25.911 Q5.2 12.665,21.879 13.45,21.094 v1(13.45,15.887)
IO26: J5.37 Q4.2 R7.1 | length 24.7
  Top Layer w0.2: v1(5.715,10.795) 8.636,10.795 10.91,8.521 J5.37
  Bottom Layer w0.2: R7.1 3.503,25.911 Q4.2 3.503,21.262 5.715,19.05 v1(5.715,10.795)
LED_B: J5.15 J6.10 | length 5.4
  Bottom Layer w0.2: J6.10 37.592,9.652 38.85,8.394 J5.15
LED_G: J5.18 J6.11 | length 11.5
  Bottom Layer w0.2: J6.11 36.322,12.192 36.322,9.906 37.592,8.636 37.592,4.782 J5.18
LED_R: J5.12 J6.4 | length 8
  Bottom Layer w0.2: J5.12 45.212,4.782 J6.4
MISO: J5.21 U1.15 | length 37
  Top Layer w0.2: J5.21 32.571,4.699 34.544,4.699 35.052,5.207 35.052,6.731 36.195,7.874 58.72,7.874 62.357,11.511 U1.15
MOSI: J5.19 U1.14 | length 31.9
  Top Layer w0.2: J5.19 36.004,8.274 58.554,8.274 61.857,11.577 U1.14
NetC1_2: C1.2 U1.6 Y1.1 | length 6.3
  Top Layer w0.2: Y1.1 57.332,17.598 57.785,17.145 ; C1.2 58.42,17.526 58.039,17.145 57.785,17.145 ; U1.6 58.249,16.046 57.785,16.51 57.785,17.145
NetC2_2: C2.2 U1.7 Y1.2 | length 7.7
  Top Layer w0.2: C2.2 55.615,13.887 Y1.2 57.459,13.898 57.785,14.224 57.785,14.986 58.345,15.546 U1.7
NetC5_2: C5.2 U2.5 | length 3
  Bottom Layer w0.2: C5.2 68.834,25.146 69.446,24.534 U2.5
NetC9_2: C9.2 R20.2 R21.1 U5.4 | length 13.3
  Bottom Layer w0.4: C9.2 8.382,34.925 10.16,34.925 ; R21.1 10.16,34.925 ; U5.4 10.16,34.925 ; R20.2 11.938,34.925 10.16,34.925
NetC12_2: C12.2 R22.2 R23.1 U6.4 | length 13.3
  Bottom Layer w0.4: C12.2 19.431,34.925 21.209,34.925 ; R23.1 21.209,34.925 ; U6.4 21.209,34.925 ; R22.2 22.987,34.925 21.209,34.925
NetC15_2: C15.2 R24.2 R25.1 U7.4 | length 13.3
  Bottom Layer w0.4: C15.2 30.353,34.925 32.131,34.925 ; R25.1 32.131,34.925 ; U7.4 32.131,34.925 ; R24.2 33.909,34.925 32.131,34.925
NetD1_1: D1.1 D2.1 F1.2 | length 16.2
  Top Layer w1.5: F1.2@46.595,47.371 49.149,47.371 ; D2.1 49.844,50.606 49.149,49.911 49.149,47.371 ; F1.2@51.595,47.371 49.149,47.371
  Bottom Layer w1.5: F1.2@51.595,47.371 D1.1
NetD3_2: D3.2 L1.1 U5.2 | length 13.8
  Top Layer w0.7: D3.2 9.592,31.182 11.176,32.766 12.192,32.766 13.208,33.782 L1.1 13.56,35.683 U5.2
NetD4_2: D4.2 L2.1 U6.2 | length 13.9
  Top Layer w0.7: D4.2 20.768,31.182 22.352,32.766 23.368,32.766 24.384,33.782 24.384,35.204 L2.1
  Top Layer w0.8: L2.1@24.384,35.204 24.609,35.429 U6.2
NetD5_2: D5.2 L3.1 U7.2 | length 13.8
  Top Layer w0.7: D5.2 31.944,31.182 33.528,32.766 34.544,32.766 35.56,33.782 35.56,35.204 L3.1
  Top Layer w0.8: U7.2 35.531,35.233 L3.1@35.56,35.204
NetJ1_1: J1.1 R2.2 | length 3.4
  Bottom Layer w0.2: J1.1 73.533,25.759 ccw(c74.4,25.759) 73.787,25.146 cw(c73.48,24.839) 73.914,24.839 R2.2
NetJ9_2: J9.2 Q6.3 | length 2.9
  Bottom Layer w0.4: Q6.3 46.482,38.14 J9.2
NetJ10_2: J10.2 Q7.3 | length 2.8
  Bottom Layer w0.2: Q7.3 42.672,36.449 43.307,37.084 J10.2@43.307,38.111
  Bottom Layer w0.4: J10.2@43.307,38.111 J10.2
NetJ11_2: J11.2 Q8.3 | length 2.9
  Bottom Layer w0.4: Q8.3 52.589,38.1 J11.2
NetR1_1: R1.1 U1.17 | length 2.8
  Top Layer w0.2: U1.17 64.194,14.546 64.389,14.351 64.389,13.97 64.77,13.589 R1.1
RXD: J5.10 U3.6 | length 24.4
  Top Layer w0.2: v1(45.974,21.717) 45.989,21.732 49.782,21.732 U3.6
  Bottom Layer w0.2: v1(45.974,21.717) 45.974,18.034 49.022,14.986 49.022,8.001 47.752,6.731 47.752,4.782 J5.10
SW1: J5.32
SW2: J5.33
SWCLK: J5.40 J7.1 | length 38
  Top Layer w0.2: v1(14.605,8.255) v1(26.162,8.255)
  Bottom Layer w0.2: J5.40 9.652,4.782 9.652,7.747 10.16,8.255 v1(14.605,8.255) ; v1(26.162,8.255) 26.162,14.039 30.411,18.288 32.766,18.288 J7.1
SWDIO: J5.26 J7.3 | length 20.6
  Bottom Layer w0.2: J5.26 24.892,4.758 24.892,8.001 23.622,9.271 23.622,14.605 24.365,15.348 25.566,15.348 27.197,16.979 27.197,17.799 J7.3
TRG_RST: J5.38 J7.4 | length 30.2
  Bottom Layer w0.2: J5.38 12.251,2.159 16.637,2.159 17.272,2.794 17.272,6.985 18.269,7.982 18.904,7.982 21.082,10.16 21.082,14.097 22.733,15.748 25.4,15.748 26.797,17.145 J7.4
TXD: J5.8 U3.2 | length 28.4
  Top Layer w0.2: v1(46.99,26.797) U3.2
  Bottom Layer w0.2: v1(46.99,26.797) 46.99,21.59 46.374,20.974 46.374,18.2 49.422,15.152 49.422,7.474 50.165,6.731 50.165,4.655 J5.8
VIN: F1.1 J12.1 | length 11
  Top Layer w1.5: F1.1@61.595,47.371 66.595,47.371 69.215,47.371 70.104,48.26 J12.1
pads on no net: J5.27 J5.28 J5.29 J6.8 J6.16 J6.18 J6.20 J6.22 J6.24 U1.1 U1.2 U1.3 U1.4 U1.5 U1.9 U1.10 U1.13 U3.8 U3.9 U3.10 U3.11 U3.12 U3.13 U4.3 U4.4 U4.5 U4.6 U4.8 U4.9 U4.10 U4.11 U4.12 U4.13

## Polygon pours and split planes (outlines as drawn)
GND on Top Layer "top GND" (solid, remove dead copper, pour order 0): 0.508,0.508 0.508,4.953 0.508,56.769 1.778,56.769 75.057,56.769 75.057,25.527 75.057,0.508
GND on Bottom Layer "bot GND" (solid, remove dead copper, pour order 2): 0.508,0.508 0.508,56.769 75.057,56.769 75.057,0.508

## Text inside footprints (layer, text, board x,y; h text height)
C8: Top Overlay "+" at 16.37,52.312 h1.52 r180
C11: Top Overlay "+" at 27.419,52.32 h1.52 r180
C14: Top Overlay "+" at 38.341,52.32 h1.52 r180